# Altium PCB CarteBouton.PcbDoc
Units mil, origin at the board's own origin, x right, y up, seen from the top; angles counter-clockwise.
Board outline 1250 x 1100 mil, 2 copper layers (Top Layer, Bottom Layer); 10 components, 8 nets, 34 pads, 0 vias.
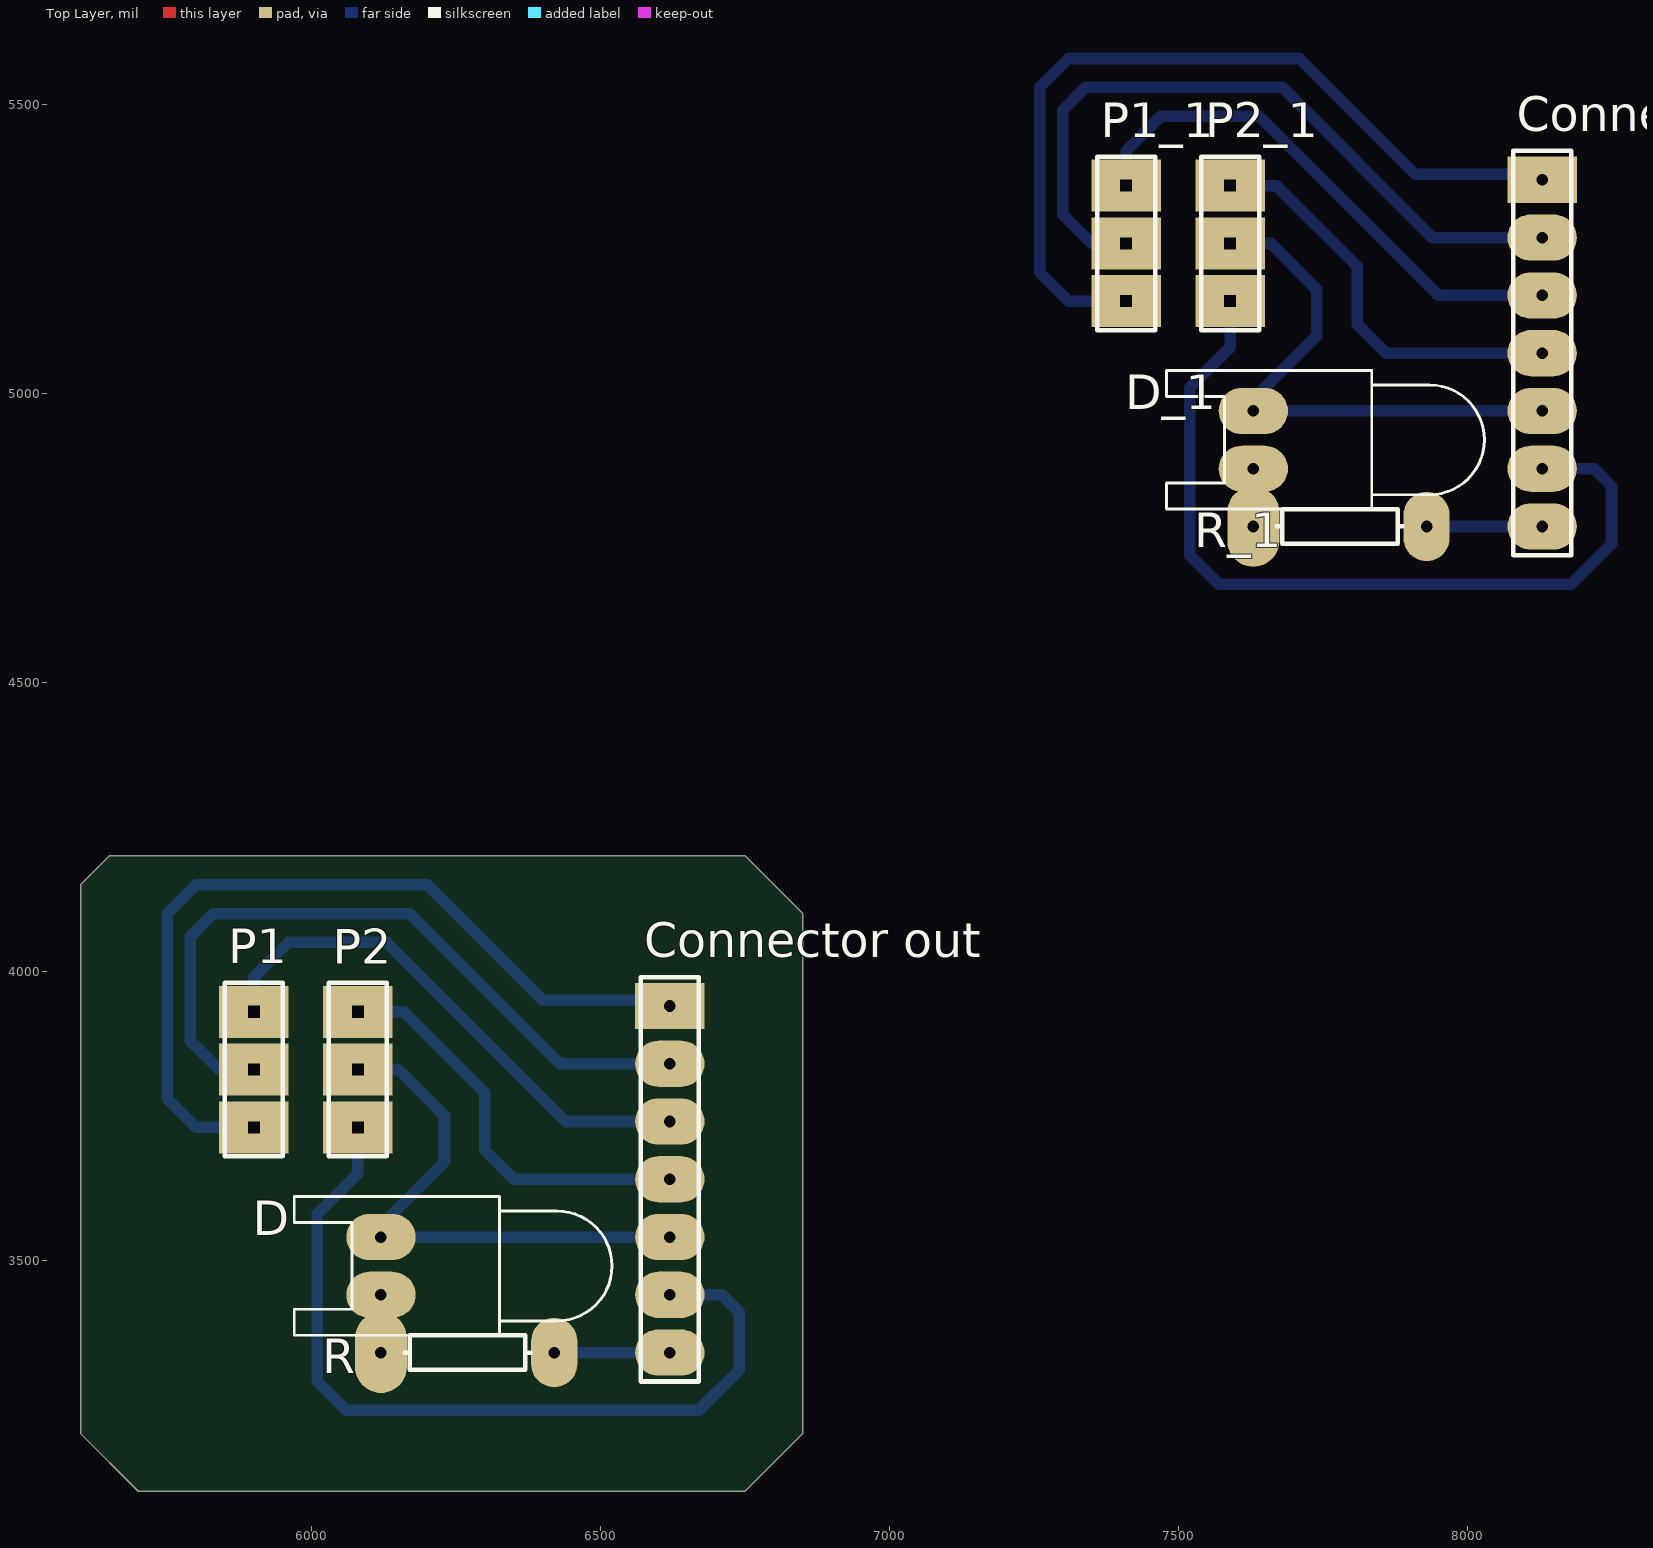
[diagram p0: Top Layer view]
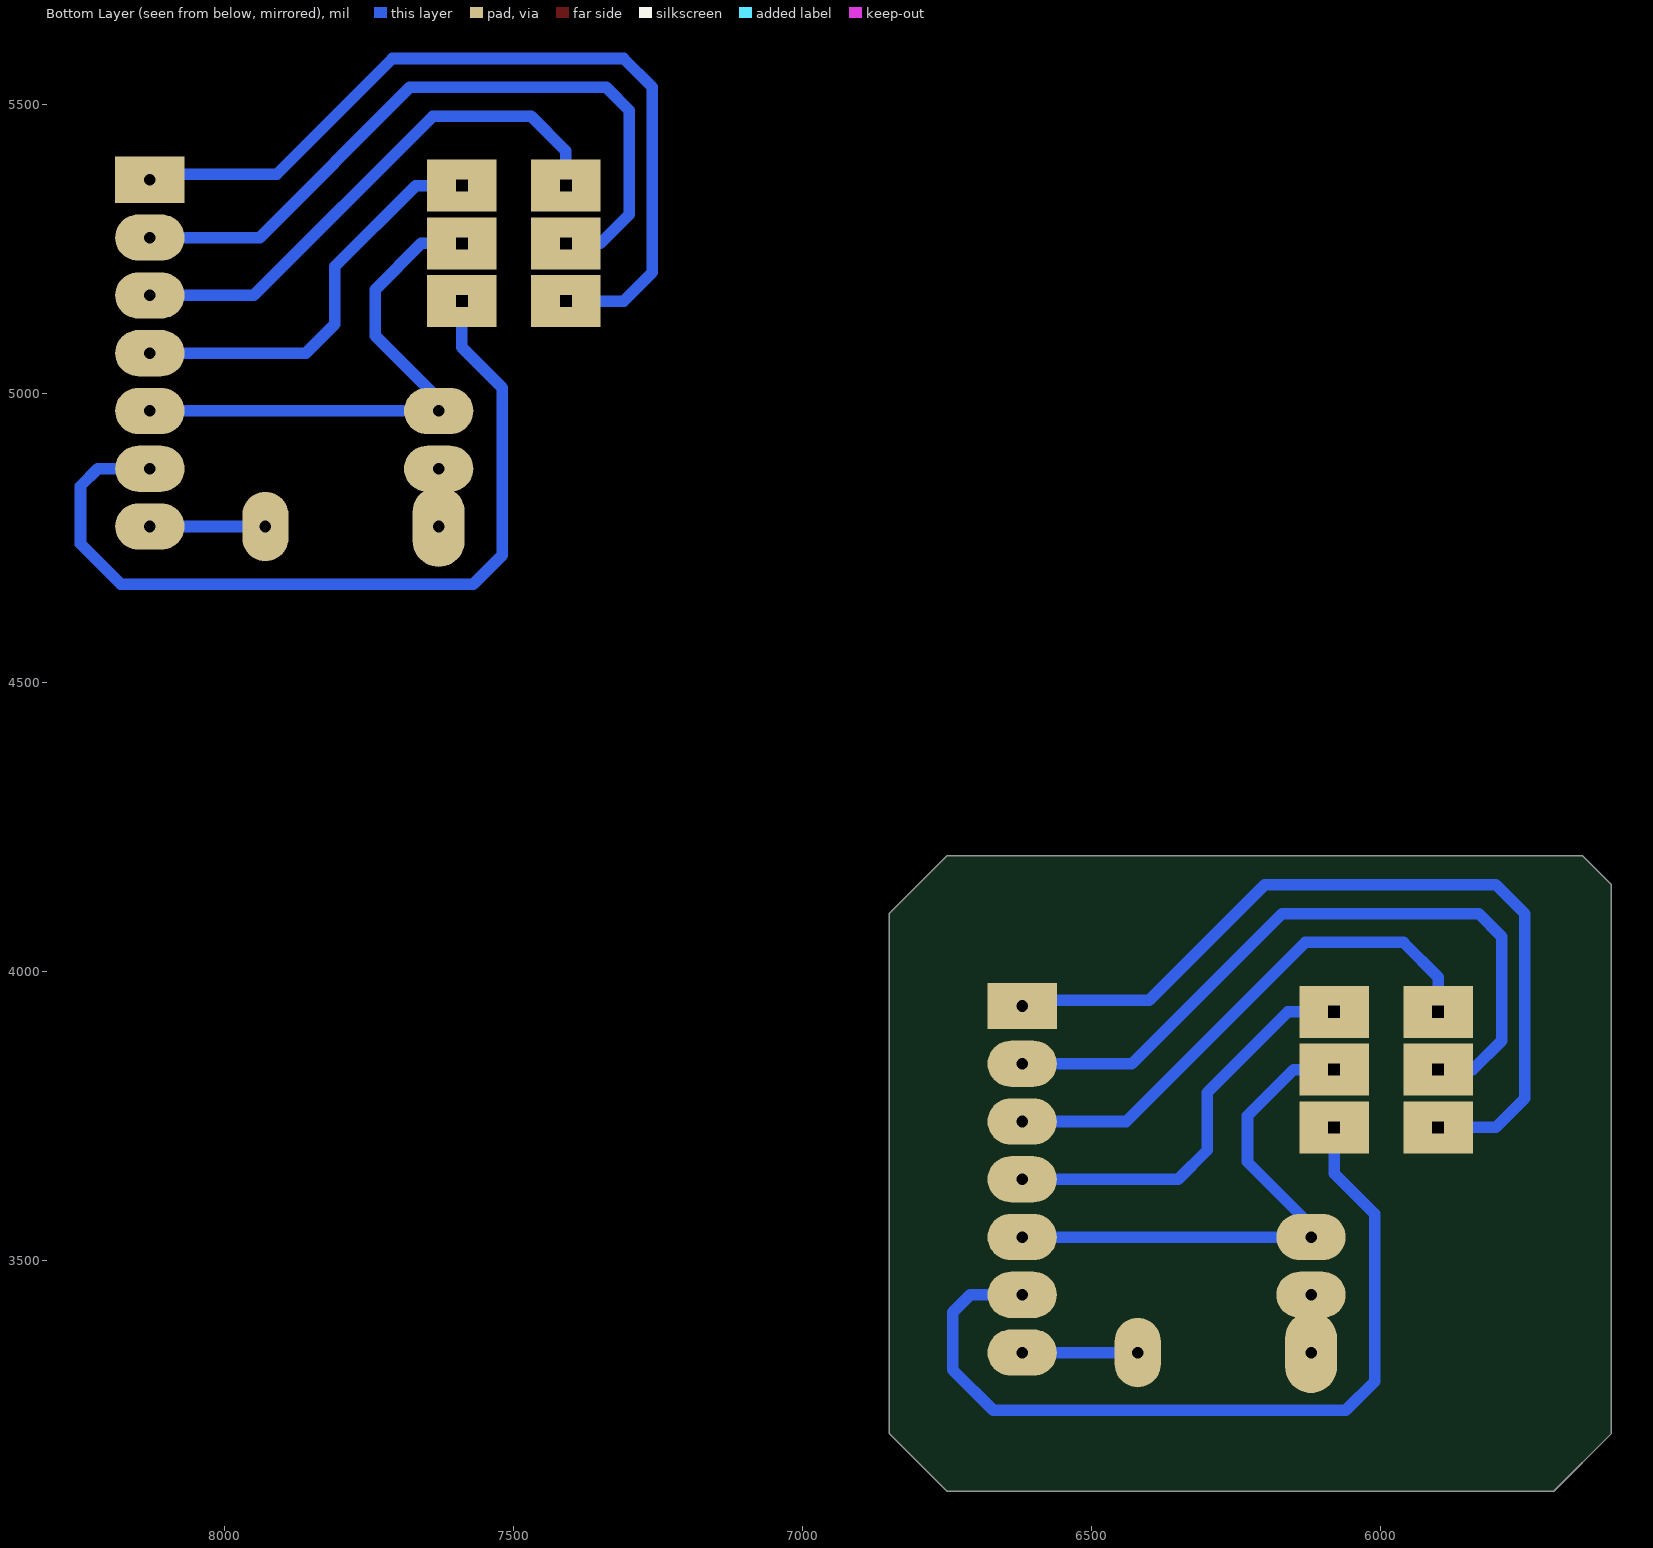
[diagram p1: Bottom Layer view, seen from below]

## Layer stack, top to bottom
Top Solder: solder mask 0.4, Solder Resist, Dk 3.5
Top Layer: signal copper 1.4
Dielectric 1: dielectric 12.6, FR-4, Dk 4.8
Bottom Layer: signal copper 1.4
Bottom Solder: solder mask 0.4, Solder Resist, Dk 3.5

## Board outline
5600,3200 5600,4150 5650,4200 6750,4200 6850,4100 6850,3200 6750,3100 5700,3100

## Design rules (kind name [scope] priority, off if disabled: settings)
AssemblyTestPointUsage [All] p1 off:
AssemblyTestpoint [All] p1 off: testpointundercomponent=TRUE minsize=40 maxsize=100 preferedsize=60 minholesize=0 maxholesize=40 preferedholesize=32 testpointgrid=1 usegrid=TRUE gridtolerance=0.01 allowsidetop=TRUE allowsidebottom=TRUE
Clearance [All] p1 off: gap=10
ComponentClearance [All] p1 off: gap=10 collisioncheckmode=3 verticalgap=10 showdistances=FALSE
DiffPairsRouting [All] p1 off: maxlimit=10 minlimit=10 mostfreqgap=10 toplayer_minwidth=15 toplayer_maxwidth=15 toplayer_prefwidth=15 bottomlayer_minwidth=15 bottomlayer_maxwidth=15 bottomlayer_prefwidth=15 maxuncoupledlength=500
FabricationTestPointUsage [All] p1 off: valid=0 allowmultiple=FALSE
FabricationTestpoint [All] p1 off: side=3 testpointundercomponent=TRUE minsize=40 maxsize=100 preferedsize=60 minholesize=0 maxholesize=40 preferedholesize=32 testpointgrid=1 allowsidetop=TRUE allowsidebottom=TRUE usegrid=TRUE gridtolerance=0.01
FanoutControl Fanout_BGA [IsBGA] p1 off: bgadir=Out bgaviamode=Centered fanoutstyle=Auto fanoutdirection=Alternating viagrid=1 // Fanout_BGA (Default Rule)
FanoutControl Fanout_LCC [IsLCC] p2 off: bgadir=Out bgaviamode=Centered fanoutstyle=Auto fanoutdirection=Alternating viagrid=1 // Fanout_LCC (Default Rule)
FanoutControl Fanout_SOIC [IsSOIC] p3 off: bgadir=Out bgaviamode=Centered fanoutstyle=Auto fanoutdirection=Alternating viagrid=1 // Fanout_SOIC (Default Rule)
FanoutControl Fanout_Small [(CompPinCount < 5)] p4 off: bgadir=Out bgaviamode=Centered fanoutstyle=Auto fanoutdirection=OutThenIn viagrid=1 // Fanout_Small (Default Rule)
FanoutControl Fanout_Default [All] p5 off: bgadir=Out bgaviamode=Centered fanoutstyle=Auto fanoutdirection=Alternating viagrid=1 // Fanout_Default (Default Rule)
Height [All] p1 off: minheight=0 maxheight=1000 prefheight=500
HoleSize [All] p1 off: absolutevalues=TRUE maxlimit=100 minlimit=1 maxpercent=80.000 minpercent=20.000
HoleToHoleClearance [All] p1 off: gap=10 allowstackedmicrovias=TRUE
LayerPairs [All] p1 off: enforce=TRUE
MinimumSolderMaskSliver [All] p1 off: minsoldermaskwidth=10
NetAntennae [All] p1 off: netantennaetolerance=0
PasteMaskExpansion [All] p1 off: expansion=0
PlaneClearance [All] p1 off: clearance=20
PlaneConnect [All] p1 off: planeconnectstyle=Relief reliefexpansion=20 reliefentries=4 reliefconductorwidth=10 reliefairgap=10
PolygonConnect [All] p1 off: connectstyle=Relief reliefconductorwidth=10 reliefentries=4 polygonreliefangle="90 Angle" airgapwidth=10
RoomDefinition CarteBouton [InComponentClass('CarteBouton')] p1 off: confinementstyle=ConfineIn formatcopy=TRUE lockcomponents=FALSE outline 7045,1060 8775,1060 8775,1880 7045,1880
RoutingCorners [All] p1 off: cornerstyle=45-Degree minsetback=100 maxsetback=100
RoutingLayers [All] p1 off: top layer_v5=TRUE bottom layer_v5=TRUE
RoutingPriority [All] p1 off: routingpriority=0
RoutingTopology [All] p1 off: topology=Shortest
RoutingVias [All] p1 off: holewidth=28 width=50 viastyle="Through Hole" minholewidth=28 minwidth=50 maxholewidth=28 maxwidth=50
ShortCircuit [All] p1 off: allowed=FALSE
SilkToBoardRegionClearance [All] p1 off:
SilkToSilkClearance [All] p1 off: silktosilkclearance=10
SilkToSolderMaskClearance [IsPad] p1 off: minsilkscreentomaskgap=10 clearancetoexposedcopper=TRUE
SolderMaskExpansion [All] p1 off: expansion=4
UnRoutedNet [All] p1 off:
Width [All] p1: maxlimit=25 minlimit=20 preferedwidth=25

## Classes and differential pairs
component class CarteBouton: "Connector out" D P1 P2 R

## Components (designator, comment, footprint, x,y, rotation, side; value= is the part's Value field where it differs from the comment)
"Connector out" "Header 7" HDR1X7 6620,3940 r270 top
"Connector out_1" "Header 7" HDR1X7 8130,5370 r270 top (schematic designator "Connector out")
D "LED" LED-0 6120,3490 r90 top
D_1 "LED" LED-0 7630,4920 r90 top (schematic designator D)
P1 "Button Pi" HDR1X3 5900,3930 r270 top
P1_1 "Button Pi" HDR1X3 7410,5360 r270 top (schematic designator P1)
P2 "Button-2" HDR1X3 6080,3730 r90 top
P2_1 "Button-2" HDR1X3 7590,5160 r90 top (schematic designator P2)
R "Res1" AXIAL-0.3 6270,3340 r0 top
R_1 "Res1" AXIAL-0.3 7780,4770 r0 top (schematic designator R)

## Footprints (in the part's own frame and the unit in brackets; to place one, negate y for a bottom-side part, rotate by r counter-clockwise, add the part's x,y. Pads: shape width x height; smd on the part's side, far side on the other; paste and mask are expansions set on the pad)
AXIAL-0.3 [mil] "Axial Device, Thru-Hole; 2 Leads; 0.3 in Pin Spacing"
  oval 90x140 hole 20: 1(-150,0)
  oval 80x120 hole 20: 2(150,0)
  silkscreen extent -109,-30 109,30
HDR1X3 [mil] "Connector; Header; 3 Position"
  rect 90x120 hole 20 square: 1(0,0) 2(100,0) 3(200,0)
  silkscreen extent -50,-50 250,50
HDR1X7 [mil] "Connector; Header; 7 Position"
  rect 80x120 hole 20: 1(0,0)
  oval 80x120 hole 20: 2(100,0) 3(200,0) 4(300,0) 5(400,0) 6(500,0) 7(600,0)
  silkscreen extent -50,-50 650,50
LED-0 [mil] "LED; 2 Leads"
  oval 80x120 hole 20: 1(50,0) 2(-50,0)
  silkscreen extent -120,-400 120,150

## Part data
"Connector out" "Connector out_1": "Header, 7-Pin"
D D_1: library part LED0, "Typical INFRARED GaAs LED"
P1 P1_1 P2 P2_1: library part "Header 3", "Header, 3-Pin"
R R_1: "Resistor"

## Nets (pads, with @x,y where several pads share a name; then routed paths per layer and width w, separated by ;. In a path a pad name is that pad's centre, name@x,y a point inside that pad or via, vN(x,y) a via of type N, cw(c..) or ccw(c..) an arc to the next point about the centre after c; other vN are vias at no path point)
5V-1: "Connector out.1" P1.3 | length 1458.4
  Bottom Layer w20: P1.3 5800,3730 5750,3780 5750,4100 5800,4150 6200,4150 6400,3950 6600,3950 6610,3940
5V-2: "Connector out.6" P2.1 | length 1491.1
  Bottom Layer w20: P2.1@6080,3740 6080,3650 6010,3580 6010,3290 6060,3240 6670,3240 6740,3310 6740,3410 6710,3440 6620,3440
"NetConnector out_7": "Connector out.7" R.2 | length 190
  Bottom Layer w20: R.2 6610,3340
NetD_2: D.2 R.1 | length 120
  Bottom Layer w20: R.1 D.2@6120,3460
OFF: "Connector out.4" P2.3 | length 712.8
  Bottom Layer w20: P2.3@6080,3940 6090,3930 6160,3930 6300,3790 6300,3690 6350,3640 6610,3640
OFF-PI: "Connector out.3" P1.1 | length 921.5
  Bottom Layer w20: P1.1@5920,3940 5900,3960 5900,3990 5960,4050 6130,4050 6440,3740 6610,3740
VCC-1: "Connector out.2" P1.2 | length 1259.1
  Bottom Layer w20: P1.2@5900,3840 5890,3830 5840,3830 5790,3880 5790,4060 5830,4100 6170,4100 6430,3840 6610,3840
VCC-2: "Connector out.5" D.1 P2.2 | length 922.8
  Bottom Layer w20: P2.2@6080,3840 6090,3830 6150,3830 6230,3750 6230,3670 D.1@6120,3560 ; D.1 6620,3540
pads on no net: "Connector out_1.1" "Connector out_1.2" "Connector out_1.3" "Connector out_1.4" "Connector out_1.5" "Connector out_1.6" "Connector out_1.7" D_1.1 D_1.2 P1_1.1 P1_1.2 P1_1.3 P2_1.1 P2_1.2 P2_1.3 R_1.1 R_1.2
copper on no net: | length 7075.9
  Bottom Layer w20: 7410,5160 7310,5160 7260,5210 7260,5530 7310,5580 7710,5580 7910,5380 8110,5380 8120,5370 ; 7410,5270 7400,5260 7350,5260 7300,5310 7300,5490 7340,5530 7680,5530 7940,5270 8120,5270 ; 7430,5370 7410,5390 7410,5420 7470,5480 7640,5480 7950,5170 8120,5170 ; 7590,5170 7590,5080 7520,5010 7520,4720 7570,4670 8180,4670 8250,4740 8250,4840 8220,4870 8130,4870 ; 7590,5270 7600,5260 7660,5260 7740,5180 7740,5100 7630,4990 ; 7590,5370 7600,5360 7670,5360 7810,5220 7810,5120 7860,5070 8120,5070 ; 7630,4770 7630,4890 ; 7630,4970 8130,4970 ; 7930,4770 8120,4770

## Silkscreen, mask and mechanical layers (free items; w line width, h text height)
Mechanical 1:
  lines w10: 5600,3200 5700,3100 6750,3100 6850,3200 6850,4100 6750,4200 5650,4200 5600,4150 5600,3200 ; 7110,4630 7110,5580 7160,5630 8260,5630 8360,5530 8360,4630 8260,4530 7210,4530 7110,4630